# EAGLE board sensor board (EAGLE 9.6.1)
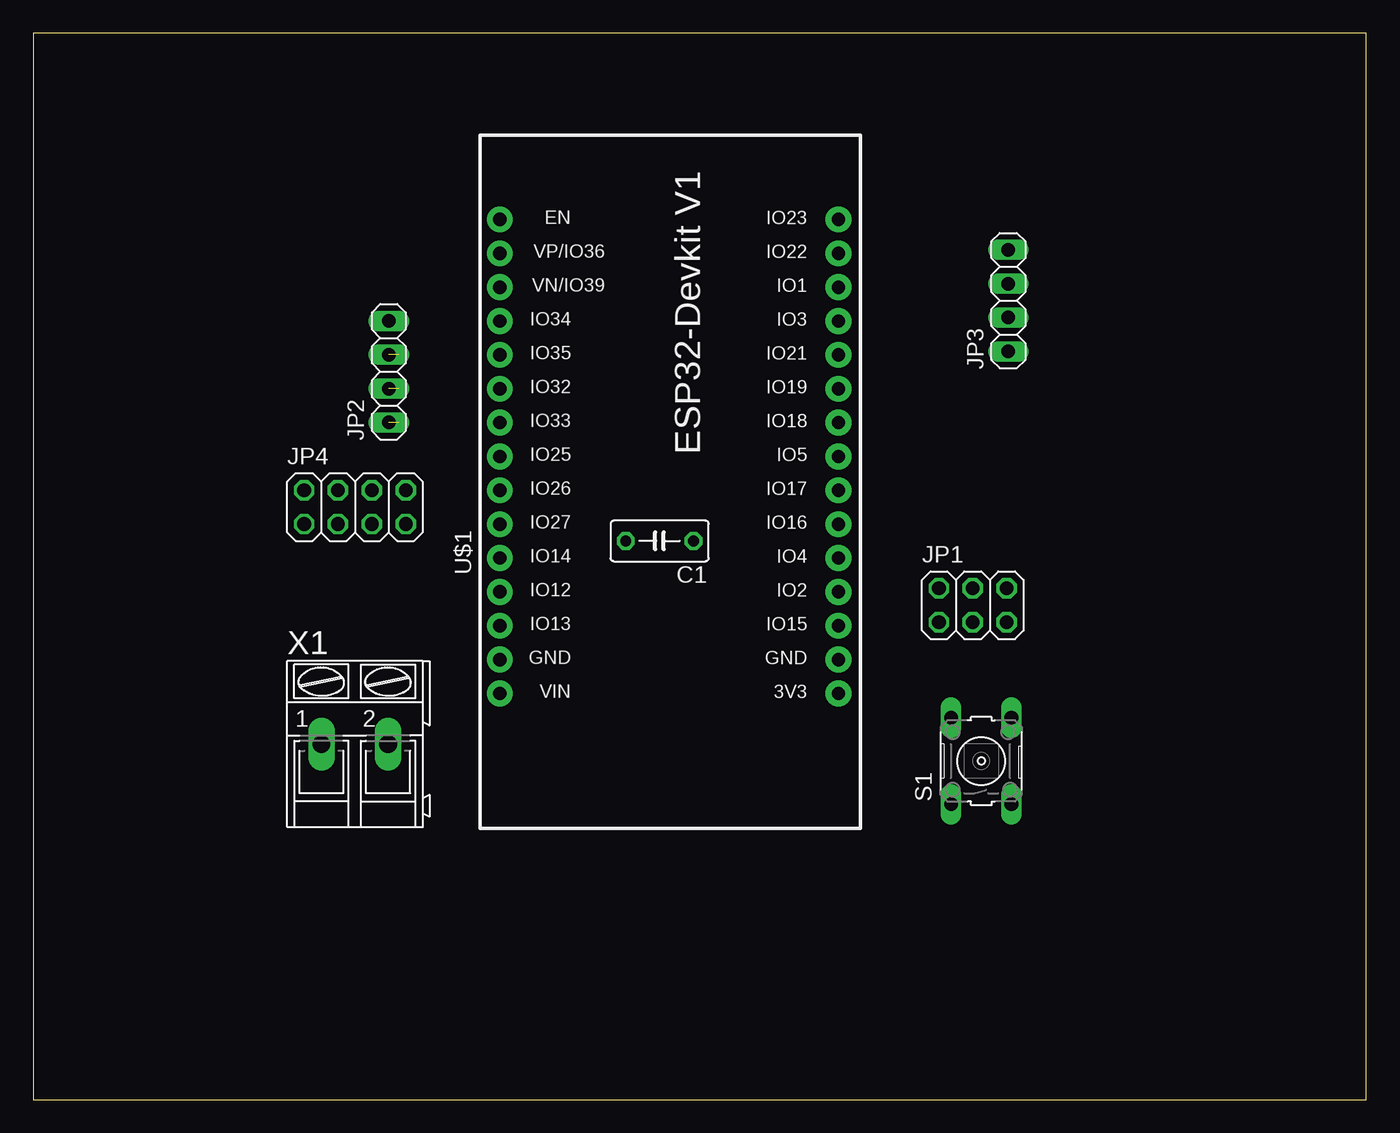
[diagram p0: board, top side]
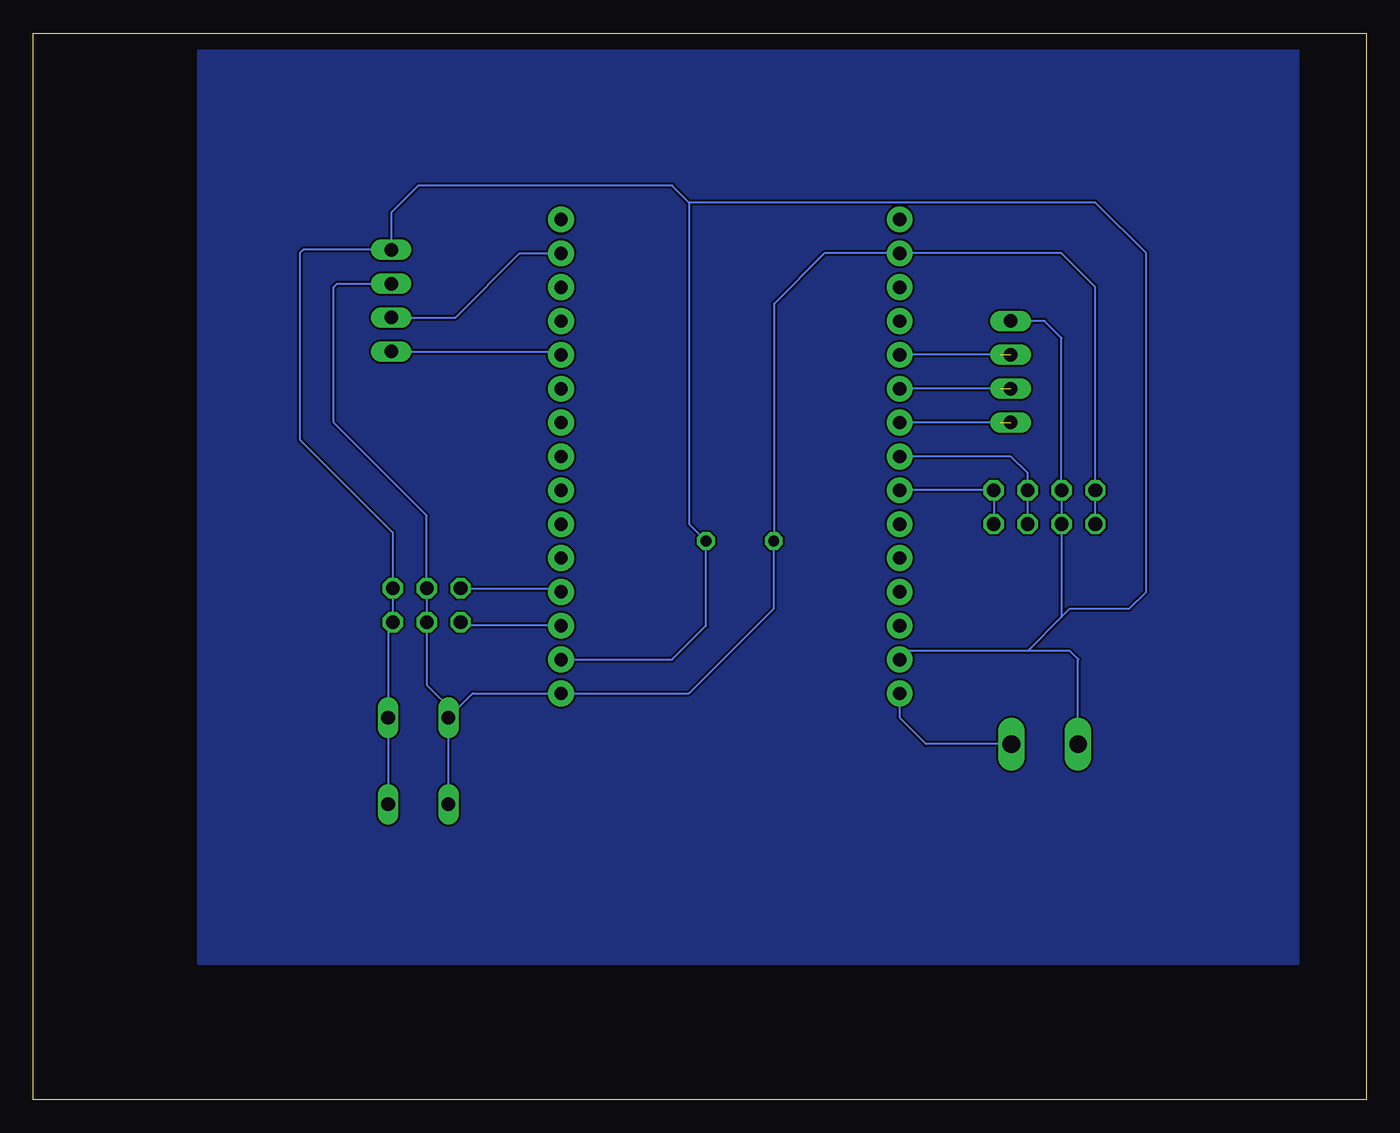
[diagram p1: board, bottom side, seen from below]

Size 100 x 80 mm. Coordinates in mm from the lower left corner, seen from the top.
Outline: 0,0 100,0 100,80 0,80 0,0
Copper layers (1*16): Top 0.035mm / dielectric 1.5mm / Bottom 0.035mm
Design rules "default": minimum track width 6mil, minimum drill 0.35mm, track to track 6mil, track to pad 6mil, pad to pad 6mil, via to via 6mil, smd to smd 6mil, copper to edge 40mil, drill to drill 6mil, minimum pad ring 10mil, minimum via ring 8mil, stop-mask expansion 4mil, vias tented up to drill 0mil, thermal gap 10mil

## Footprints (pad centres in the part's own frame; a part is rotated, then mirrored left to right if it is on the bottom)
C050-030X075 = drill 0.813 octagon: 1 -2.54,0; 2 2.54,0
2X03 = drill 1.016 octagon: 1 -2.54,-1.27; 2 -2.54,1.27; 3 0,-1.27; 4 0,1.27; 5 2.54,-1.27; 6 2.54,1.27
1X04 = drill 1.016 long: 1 -3.81,0; 2 -1.27,0; 3 1.27,0; 4 3.81,0
2X04 = drill 1.016 octagon: 1 -3.81,-1.27; 2 -3.81,1.27; 3 -1.27,-1.27; 4 -1.27,1.27; 5 1.27,-1.27; 6 1.27,1.27; 7 3.81,-1.27; 8 3.81,1.27
B3F-10XX = drill 1.016 long: 1 -3.251,2.261; 2 3.251,2.261; 3 -3.251,-2.261; 4 3.251,-2.261
ESP32-DEVKITV1 = drill 1 pad 1.93: 3V3 -16.52,-12.27; D1 13.96,-12.27; D2 -8.9,-12.27; D3 11.42,-12.27; D4 -6.36,-12.27; D5 1.26,-12.27; D12 -8.9,13.135; D13 -11.44,13.135; D14 -6.36,13.135; D15 -11.44,-12.27; D16 -3.82,-12.27; D17 -1.28,-12.27; D18 3.8,-12.27; D19 6.34,-12.27; D21 8.88,-12.27; D22 16.5,-12.27; D23 19.04,-12.27; D25 1.26,13.135; D26 -1.28,13.135; D27 -3.82,13.135; D32 6.34,13.135; D33 3.8,13.135; D34 11.42,13.135; D35 8.88,13.135; D36 16.5,13.135; D39 13.96,13.135; EN 19.04,13.135; GND@1 -13.98,13.135; GND@2 -13.98,-12.27; VIN -16.52,13.135
AK300/2 = drill 1.321 long: 1 -2.515,0; 2 2.489,0

## Placement (x,y rotation side)
C1  [C050-030X075]  46.99,41.91 180 top
JP1  [2X03]  70.48,37.08 0 top
JP2  [1X04]  26.67,54.61 90 top
JP3  [1X04]  73.15,59.94 90 top
JP4  [2X04]  24.13,44.45 0 top
S1  [B3F-10XX]  71.12,25.4 90 top
U$1  ESP32DEVKITV1  [ESP32-DEVKITV1]  48.13,46.99 90 top
X1  [AK300/2]  24.13,26.67 0 top

## Library data of the parts
C1 = rcl; SPICEPREFIX: C
JP1-JP4 = pinhead
S1 = switch-omron; MPN: B3F-1000; OC_FARNELL: 176432; OC_NEWARK: 36M3542
U$1 = esp32-devkitv1
X1 = con-ptr500; OC_FARNELL: unknown; OC_NEWARK: unknown

## Nets
GND: C1.1 JP1.5 JP1.6 JP2.4 JP3.4 JP4.3 JP4.4 S1.3 S1.4 U$1.GND@1 U$1.GND@2 X1.1
MOISTURE: JP1.2 U$1.D2
OUT1: JP2.1 U$1.D33
OUT2: JP2.2 U$1.D32
OUT3: JP2.3 U$1.D35
PH: JP1.1 U$1.D15
SCL: JP3.2 U$1.D22
SCL2: JP4.5 JP4.6 U$1.D25
SDA: JP3.1 U$1.D21
SDA2: JP4.7 JP4.8 U$1.D26
V: C1.2 JP1.3 JP1.4 JP3.3 JP4.1 JP4.2 S1.1 S1.2 U$1.3V3 U$1.D36
VIN: U$1.VIN X1.2

## Tracks (layer width: path | path; a pad name or v marks a point on that pad's centre or on a via)
GND
  Bottom 0.152: X1.1 21.61,32.99 21.59,33.02 22.23,33.66 25.4,33.66 | 25.4,33.66 34.92,33.66 35.56,33.02 35.55,33.01 U$1.GND@1 | JP2.4 24.13,58.42 22.86,57.15 JP4.4 JP4.3 22.86,36.2 | 25.4,33.66 22.86,36.2 | 22.86,36.2 22.23,36.83 17.78,36.83 16.51,38.1 16.51,63.5 20.32,67.31 50.8,67.31 | 50.8,67.31 52.07,68.58 71.12,68.58 73.15,66.55 JP3.4 79.76,63.75 80.01,63.5 80.01,49.53 73.03,42.55 JP1.6 JP1.5 73.38,35.46 S1.4 S1.3 | U$1.GND@2 52.08,33.01 49.53,35.56 C1.1 50.8,43.18 50.8,67.31
MOISTURE
  Bottom 0.152: JP1.2 60.67,38.35 U$1.D2
OUT1  (1 unrouted)
  Top 0.152: 27.44,50.79 27.43,50.8
  Bottom 0.152: JP2.1 35.56,50.8 35.55,50.79 U$1.D33
OUT2  (1 unrouted)
  Top 0.152: 27.44,53.33 27.43,53.34
  Bottom 0.152: JP2.2 34.99,53.34 U$1.D32
OUT3  (1 unrouted)
  Top 0.152: 27.44,55.87 27.43,55.88
  Bottom 0.152: JP2.3 34.99,55.88 U$1.D35
PH
  Top 0.152: JP1.1 67.68,35.55
  Bottom 0.152: U$1.D15 60.41,35.56 68.58,35.56 68.33,35.81 JP1.1
SCL
  Bottom 0.152: JP3.2 68.33,58.67 63.51,63.49 U$1.D22
SCL2
  Bottom 0.152: JP4.5 JP4.6 25.4,46.99 26.67,48.26 34.99,48.26 U$1.D25
SDA
  Bottom 0.152: JP3.1 60.67,56.13 U$1.D21
SDA2
  Top 0.152: JP4.8
  Bottom 0.152: JP4.7 JP4.8 34.99,45.72 U$1.D26
SENSOR
  pour Bottom: 5.08,76.2 5.08,10.16 87.63,10.16 87.63,78.74 5.08,78.74
V
  Bottom 0.152: JP4.1 JP4.2 20.32,60.96 22.86,63.5 34.99,63.5 U$1.D36 40.65,63.49 44.45,59.69 C1.2 44.45,36.83 50.81,30.47 U$1.3V3 67.04,30.47 68.44,29.07 | S1.1 S1.2 68.44,29.07 | 68.44,29.07 70.48,31.11 JP1.3 JP1.4 70.48,43.81 77.47,50.8 77.47,60.96 77.22,61.21 JP3.3
VIN
  Bottom 0.152: U$1.VIN 35,28.65 33.02,26.67 X1.2